# Altium PCB PCB1.PcbDoc
Units mil, origin at the board's own origin, x right, y up, seen from the top; angles counter-clockwise.
Board outline 1658.55 x 1658.55 mil, 2 copper layers (Top Layer, Bottom Layer); 16 components, 15 nets, 51 pads, 4 vias.
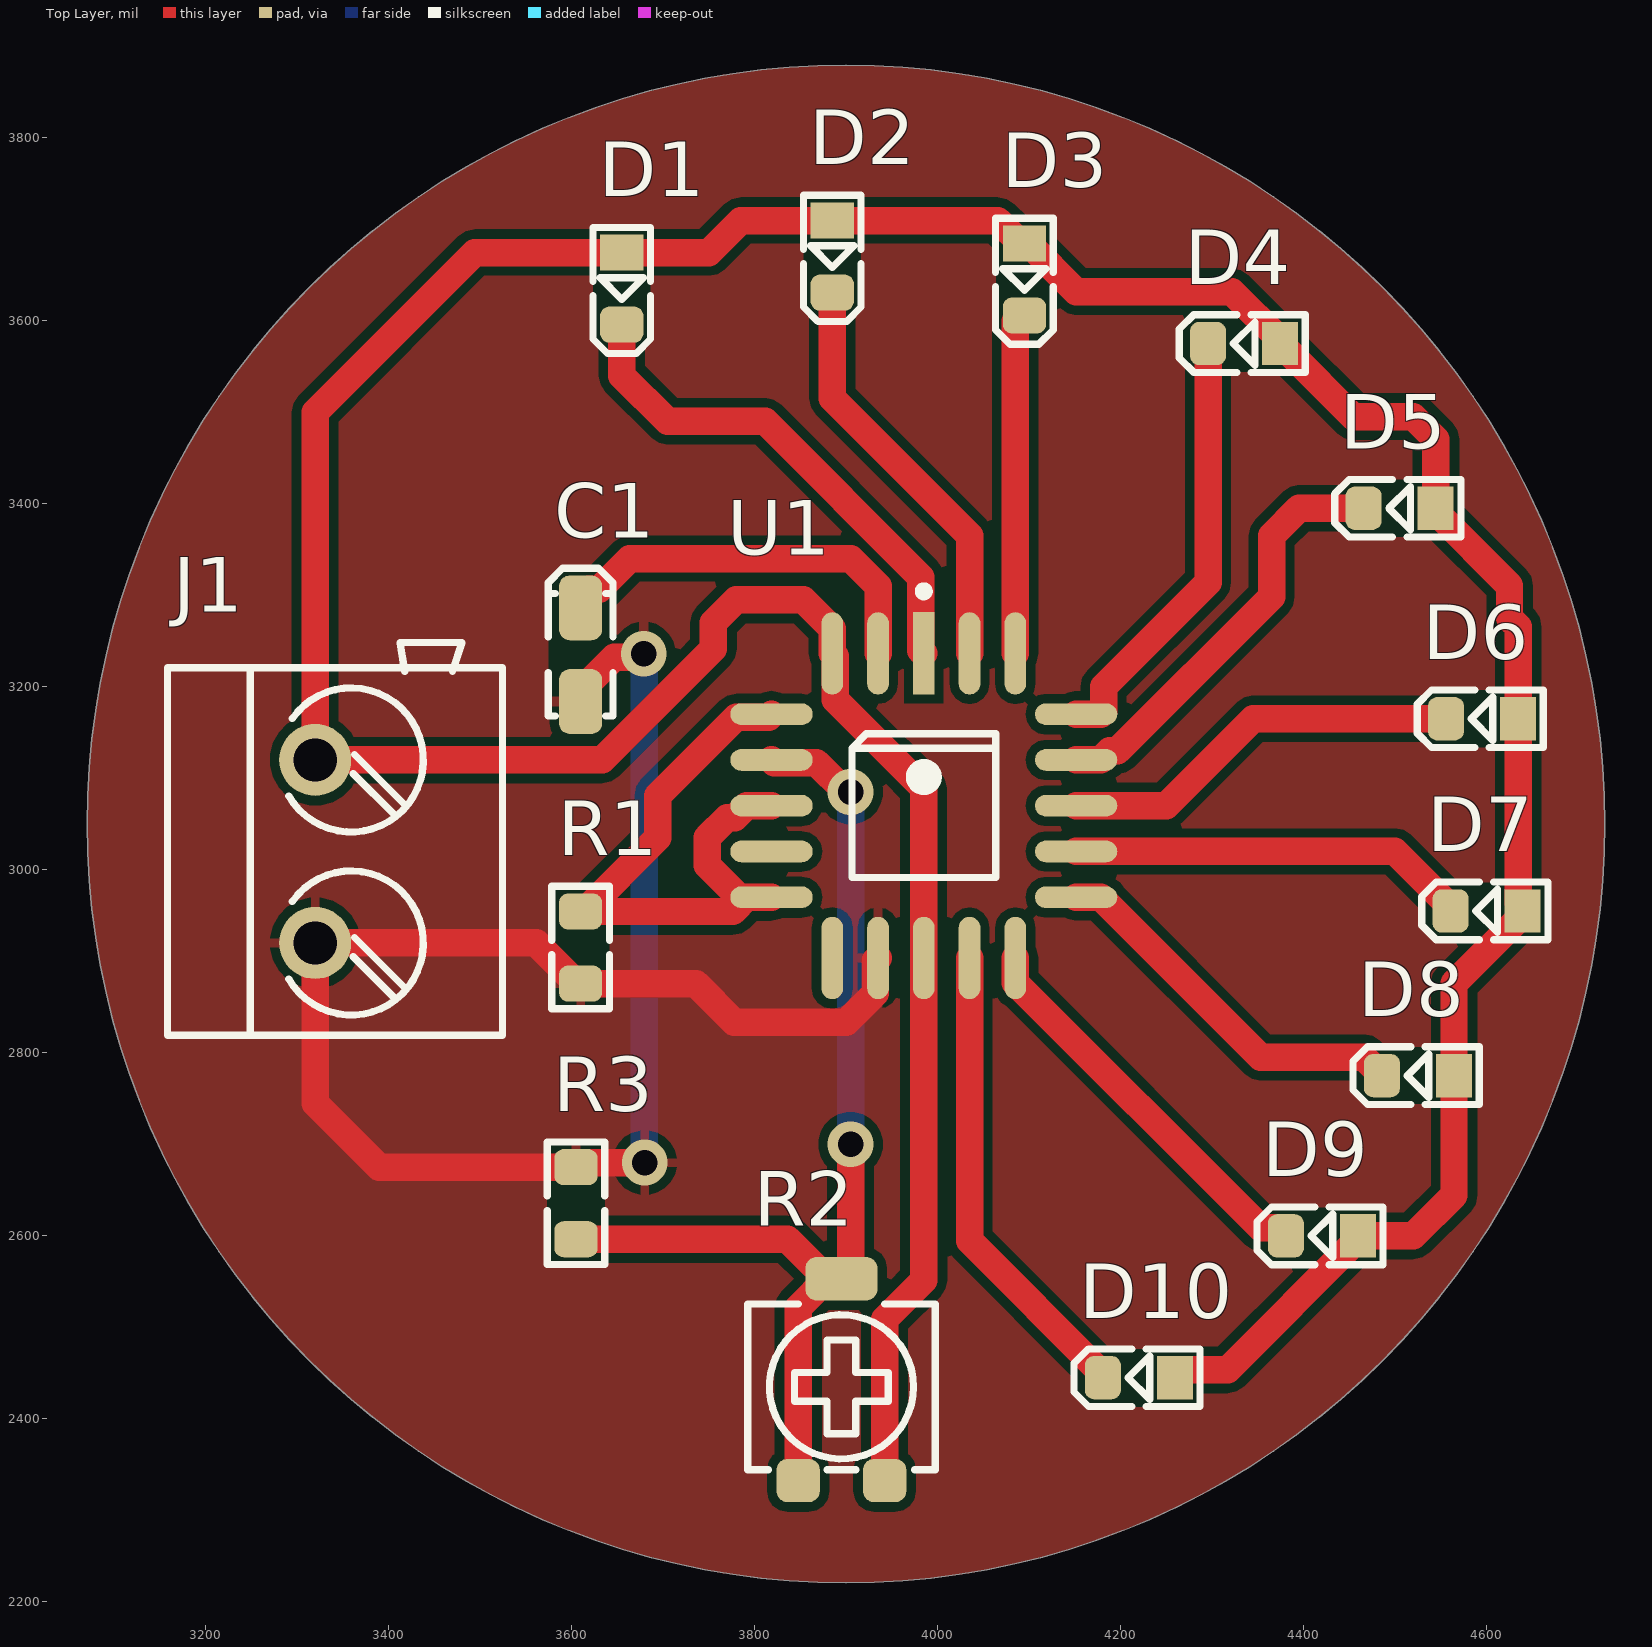
[diagram p0: Top Layer view]
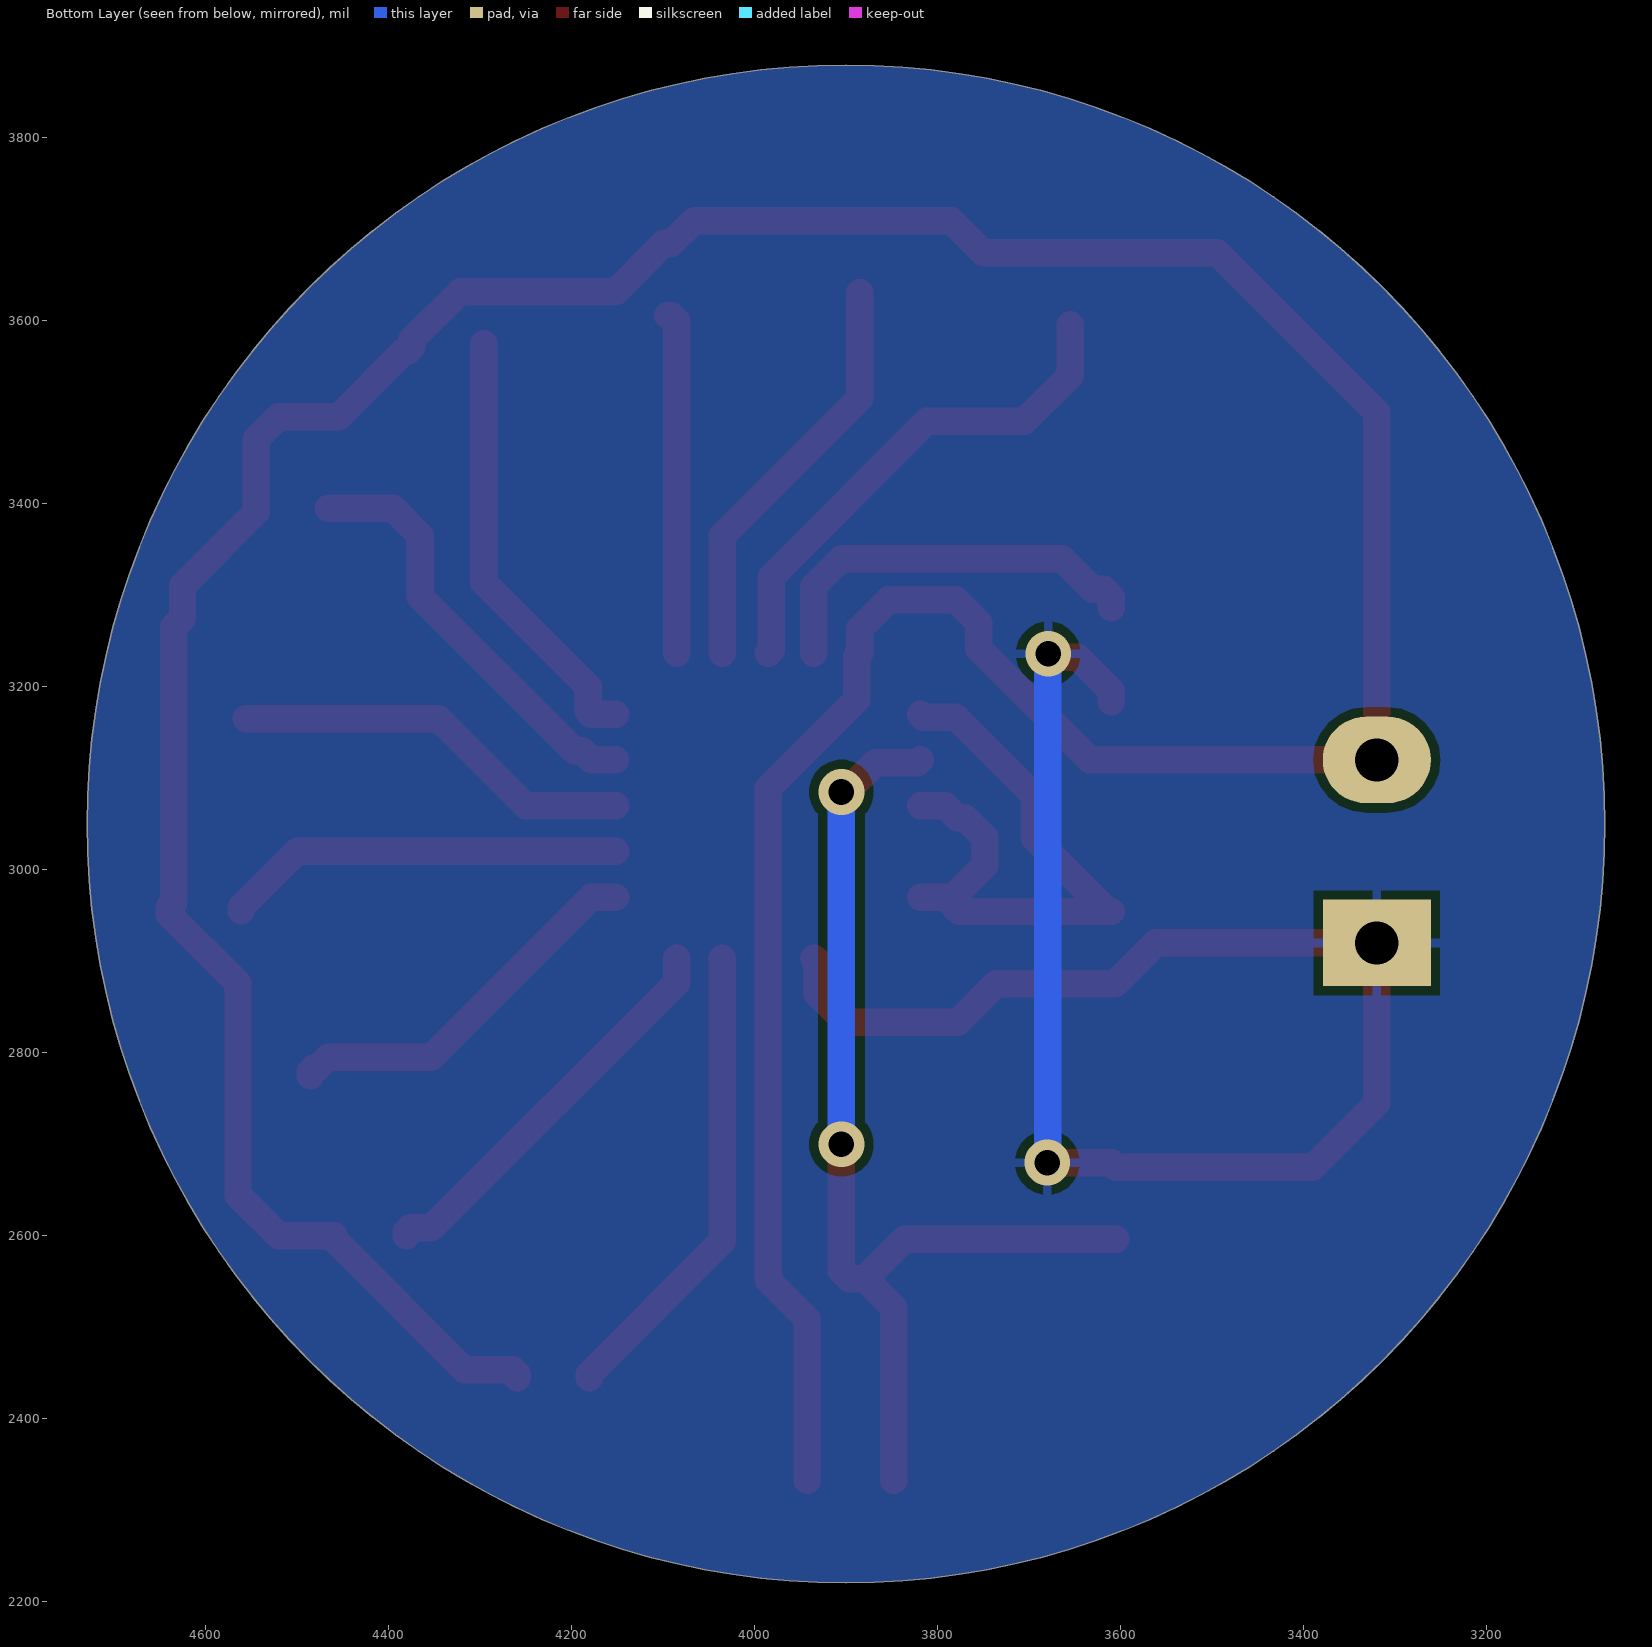
[diagram p1: Bottom Layer view, seen from below]
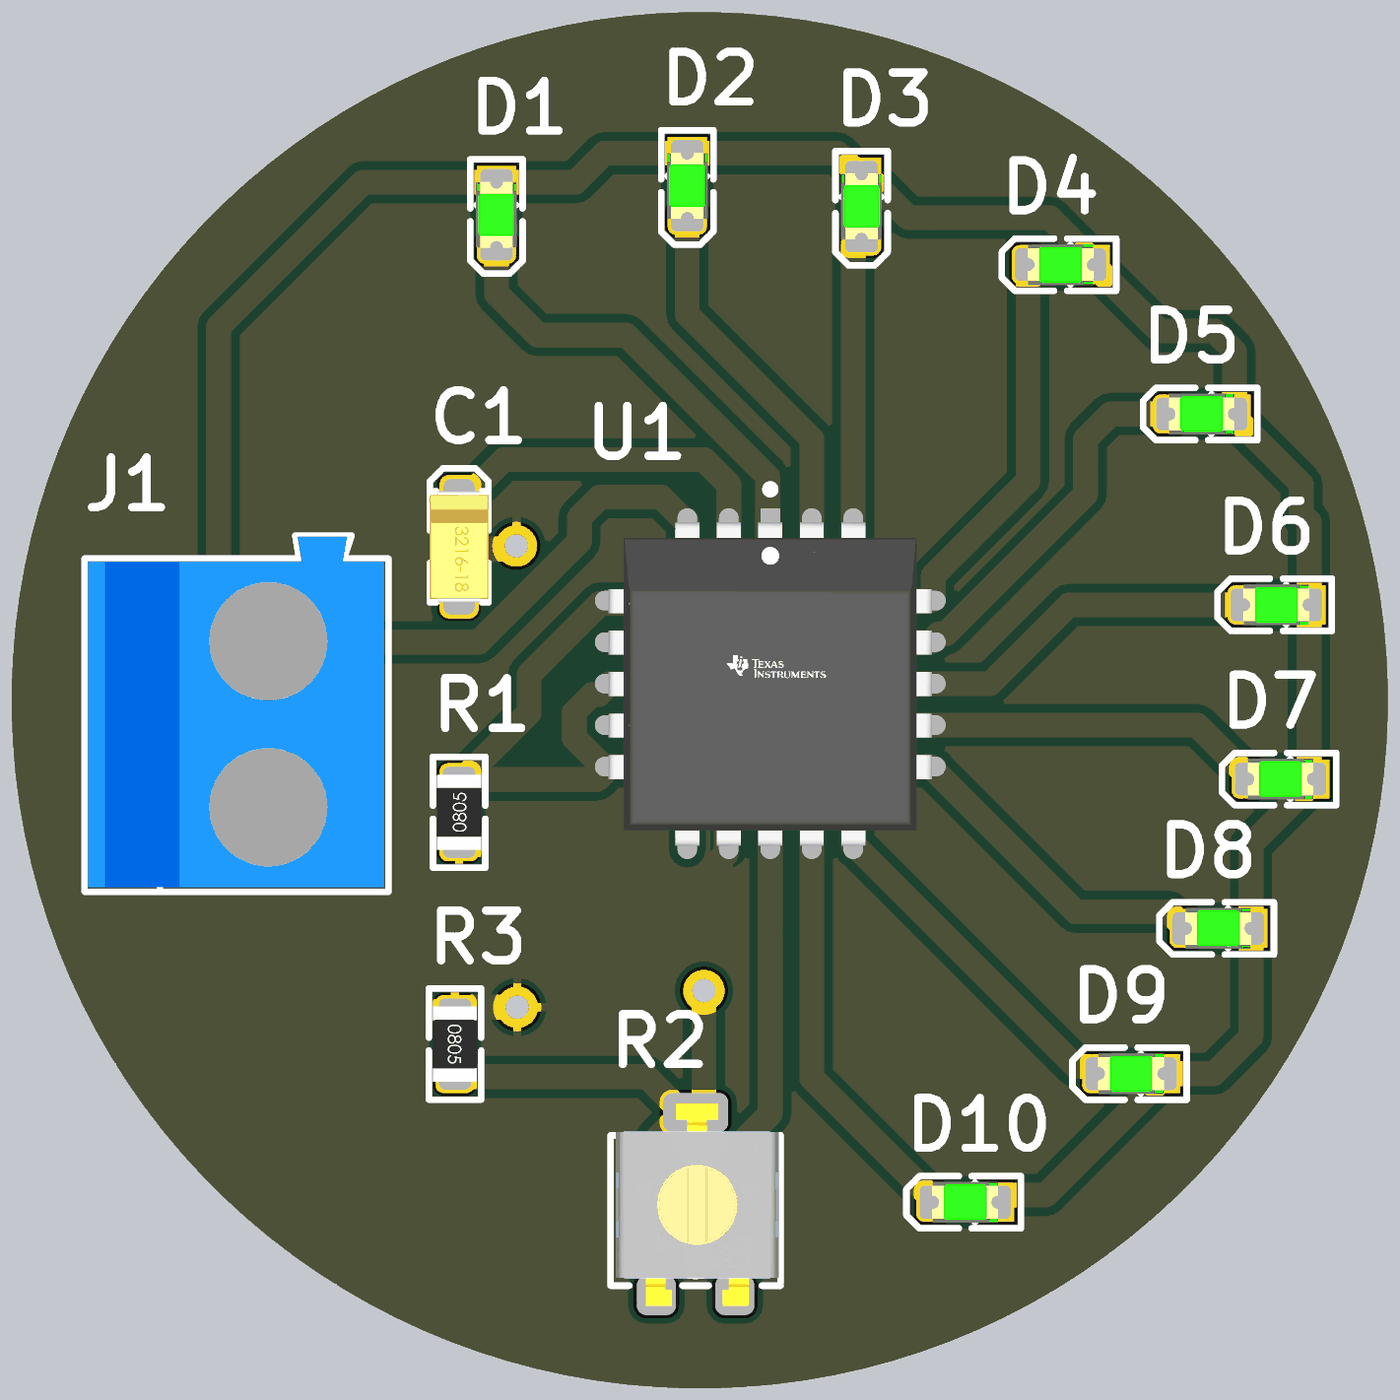
[diagram p2: 3D render of the assembled board from above, using the file's embedded part models]

## Layer stack, top to bottom
Top Solder: solder mask 0.4, Solder Resist, Dk 3.5
Top Layer: signal copper 1.4
Dielectric 1: dielectric 12.6, FR-4, Dk 4.8
Bottom Layer: signal copper 1.4
Bottom Solder: solder mask 0.4, Solder Resist, Dk 3.5

## Board outline
3070.72,3050 ccw(c3900,3050) 3900,2220.72 ccw(c3900,3050) 4729.28,3050 ccw(c3900,3050) 3900,3879.28 ccw(c3900,3050)

## Design rules (kind name [scope] priority, off if disabled: settings)
Clearance [All] p1: gap=10 ignorepadtopadclearanceinfootprint=FALSE
PolygonConnect [All] p1: connectstyle=Relief reliefconductorwidth=10 reliefentries=4 polygonreliefangle="90 Angle" airgapwidth=10
RoutingVias [All] p1: holewidth=28 width=50 viastyle="Through Hole" minholewidth=28 minwidth=50 maxholewidth=28 maxwidth=50
SolderMaskExpansion [All] p1: expansion=4 istentingtop=FALSE
SupplyNets "Schematic Supply Nets_1" [InNet('VCC')] p1: voltage=0.000
SupplyNets "Schematic Supply Nets" [InNet('GND')] p2: voltage=0.000
Width [All] p1: maxlimit=50 minlimit=10 preferedwidth=30 minimp=50.000000 maximp=50.000000 favimp=50.000000
30 further rules are at their usual default settings.

## Components (designator, comment, footprint, x,y, rotation, side; value= is the part's Value field where it differs from the comment)
C1 "-uF" C_TN_3216 3610,3235 r270 top
D1 "LED0805" LED0805 3655,3635 r270 top
D2 "LED0805" LED0805 3885,3670 r270 top
D3 "LED0805" LED0805 4095,3645 r270 top
D4 "LED0805" LED0805 4335,3575 r180 top
D5 "LED0805" LED0805 4505,3395 r180 top
D6 "LED0805" LED0805 4595,3165 r180 top
D7 "LED0805" LED0805 4600,2955 r180 top
D8 "LED0805" LED0805 4525,2775 r180 top
D9 "LED0805" LED0805 4420,2600 r180 top
D10 "LED0805" LED0805 4220,2445 r180 top
J1 "CONN_TB2" TBB_2 3320,3020 r90 top
R1 "1K" R0805 3610,2915 r90 top
R2 "POT 1K" POTS_3314G 3895,2435 r0 top
R3 "1K" R0805 3605,2635.63 r270 top
U1 "LM3914VX/NOPB" FP-FN0020A-IPC_B 3985,3070 r0 top

## Footprints (in the part's own frame and the unit in brackets; to place one, negate y for a bottom-side part, rotate by r counter-clockwise, add the part's x,y. Pads: shape width x height; smd on the part's side, far side on the other; paste and mask are expansions set on the pad)
C_TN_3216 [mm] "CAPACITOR, TAN A, 1206P, 3.2x1.6mm"
  rrect50% 1.8x1.2 smd paste-0.118 mask+0.075: 1(-1.3,0) 2(1.3,0)
  Top Layer pour cut-out: -0.762,0.9 0.762,0.9 0.762,-0.9 -0.762,-0.9
  silkscreen extent -2.4,-0.9 1.7,0.9, body extent -1.7,-0.9 1.7,0.9, height 1.7
FP-FN0020A-IPC_B [mil]
  rect 23.71x90 smd paste+0 mask+0: 1(0,166.41)
  rrect100% 23.71x90 smd paste+0 mask+0: 2(-50,166.41) 3(-100,166.41) 9(-100,-166.41) 10(-50,-166.41) 11(0,-166.41) 12(50,-166.41) 13(100,-166.41) 19(100,166.41) 20(50,166.41)
  rrect100% 90x23.71 smd paste+0 mask+0: 4(-166.41,100) 5(-166.41,50) 6(-166.41,0) 7(-166.41,-50) 8(-166.41,-100) 14(166.41,-100) 15(166.41,-50) 16(166.41,0) 17(166.41,50) 18(166.41,100)
  silkscreen extent -79,-79 79,239, body extent -221,-221 221,221, height 10
LED0805 [mm] "LED SMD 0805"
  rect 1x1.2 smd paste-2 mask+0.075: 1(-1,0)
  rrect50% 1x1.2 smd paste-2 mask+0.075: 2(1,0)
  Top Layer pour cut-out: -0.5,0.8 0.5,0.8 0.5,-0.8 -0.5,-0.8
  silkscreen extent -1.7,-0.8 1.8,0.8, body extent -1.01,-0.62 1.01,0.63, height 1.1
POTS_3314G [mm] "POT SMD, 5.0X5.0mm, Trimming, 3314G"
  rrect50% 1.2x1.2 smd: 1(-1.2,-2.6) 3(1.2,-2.6)
  rrect50% 2x1.2 smd: 2(0,3)
  silkscreen extent -2.6,-2.3 2.6,2.3, body extent -2.45,-2.93 2.55,3.27, height 2.67
R0805 [mm] "CHIP RESISTOR 1/8 WATT ,2.0X1.3mm, 0805, 2012"
  rrect50% 1x1.2 smd paste-0.1 mask+0.075: 1(-1,0) 2(1,0)
  Top Layer pour cut-out: -0.5,0.8 0.5,0.8 0.5,-0.8 -0.5,-0.8
  silkscreen extent -1.7,-0.8 1.7,0.8, body extent -1.15,-0.67 1.15,0.68, height 0.76
TBB_2 [mm] "Terminal Block Blue"
  round 2 / inner round 2 / far side rect 2.4x3 hole 1.2: 1(-2.54,0)
  round 2 / inner round 2 / far side oval 2.4x3 hole 1.2: 2(2.54,0)
  silkscreen extent -5.1,-5.2 5.8,4.1, body extent -4.96,-5.08 5.78,3.99, height 12.52

## Part data
C1: library part CAP_SMD_TAN_3216, "CAP, SMD, TAN,", PARAM2=-V
D1 D2 D3 D4 D5 D6 D7 D8 D9 D10: library part LED_SMD_0805, "LED, SMD, 0805", ASSEMBLY=ASSEMBLY, DESC=DESCRIPTION, MANF=MANF, MANF_P#=MANF_PART#, PARAM2=2.2V, PRICE=PRICE
J1: "CONN, TERMINAL BLOCK, 5.08mm pitch"
R1 R3: library part RES_SMD_0805, "RESISTOR, SMD", ASSEMBLY=ASSEMBLY, DESC=DESCRIPTION, DIST#=MOUSER, MANF=-, MANF_P#=-, PARAM=-W, PARAM2=1%, PRICE="100= 0.5$"
R2: library part RES_SMD_POT_3314G, "RESISTOR, SMD, Potentiometer"
U1: library part CMP-04914-000012-1, "IC DRVR DOT/BAR DISPLAY 20PLCC", Manufacturer="Texas Instruments", Max Supply Voltage=15V, Min Supply Voltage=3V, Output Current=10mA, Output Voltage=1.28V, Package=FN0020A, Temperature="0°C to +70°C", Temperature Range High=+70°C, Temperature Range Low=0°C, Automotive=No, Category=IC, ComponentLink2Description=Datasheet, ComponentLink2URL=http://www.ti.com/lit/ds/symlink/lm3914.pdf, Device Class L1="Integrated Circuits (ICs)", Device Class L2="Power Management ICs", Device Class L3="LED Drivers", Digikey Description="IC DRVR DOT/BAR DISPLAY 20PLCC", Height=4.57mm, Ipc Land Pattern Name=PLCC127P990X990X457-20, Lead Free=Yes, Manufacturer Part Number=LM3914VX/NOPB, Mouser Description="LED Lighting Drivers DOT/BAR DISPLAY DRVR", Number Of Outputs=10, Octopart=https://octopart.com/lm3914vx%2Fnopb-texas+instruments-24814204, RoHS=TRUE, Standoff Height=0.51mm

## Via types
v1: diameter 50, hole 28, Top Layer to Bottom Layer, 4 vias

## Nets (pads, with @x,y where several pads share a name; then routed paths per layer and width w, separated by ;. In a path a pad name is that pad's centre, name@x,y a point inside that pad or via, vN(x,y) a via of type N, cw(c..) or ccw(c..) an arc to the next point about the centre after c; other vN are vias at no path point)
GND: C1.2 J1.1 R1.1 R3.1 U1.10 | length 1920.5
  Top Layer w30: C1.2 3610,3195.63 3646.56,3232.19 3675.15,3232.19 v1(3678.98,3236.02) ; v1(3680,2680) 3623.31,2680 3622.99,2679.69 3609.69,2679.69 R3.1 3390,2675 3320,2745 J1.1 3561.69,2920 3606.06,2875.63 R1.1 3736.08,2875.63 3778.12,2833.59 3900.26,2833.59 3931.85,2865.17 3931.85,2900.44 U1.10
  Bottom Layer w30: v1(3678.98,3236.02) 3679.49,3235.51 3679.49,2680.51 v1(3680,2680)
NetC1_1: C1.1 U1.2 | length 440.2
  Top Layer w30: C1.1 3610,3297.99 3618.62,3306.61 3630.43,3306.61 3663.82,3340 3905,3340 3935,3310 U1.2
NetD1_2: D1.2 U1.1 | length 558.3
  Top Layer w30: D1.2 3655,3540 3705,3490 3811.57,3490 3981.85,3319.72 3981.85,3239.56 U1.1
NetD2_2: D2.2 U1.20 | length 456.3
  Top Layer w30: D2.2 3885,3515 4035,3365 U1.20
NetD3_2: D3.2 U1.19 | length 375.7
  Top Layer w30: U1.19 4085,3599.57 4091.06,3605.63 D3.2
NetD4_2: D4.2 U1.18 | length 480.5
  Top Layer w30: U1.18 4178.27,3170 4181.41,3173.15 4181.41,3200 4295.63,3314.22 D4.2
NetD5_2: D5.2 U1.17 | length 467.2
  Top Layer w30: U1.17 4178.27,3120 4188.27,3130 4196.68,3130 4365,3298.32 4365,3365 4395,3395 D5.2
NetD6_2: D6.2 U1.16 | length 443.6
  Top Layer w30: U1.16 4250,3070 4345,3165 D6.2
NetD7_2: D7.2 U1.15 | length 438.4
  Top Layer w30: U1.15 4499.57,3020 4560.63,2958.94 D7.2
NetD8_2: D8.2 U1.14 | length 417.3
  Top Layer w30: U1.14 4178.27,2970 4353.27,2795 4465.63,2795 4477.01,2783.62 4480.94,2783.62 4485.63,2778.94 D8.2
NetD9_2: D9.2 U1.13 | length 439.4
  Top Layer w30: U1.13 4085,2876.73 4353.11,2608.62 4375.94,2608.62 4380.63,2603.94 D9.2
NetD10_2: D10.2 U1.12 | length 518.9
  Top Layer w30: U1.12 4035,2594.57 4180.63,2448.94 D10.2
NetR1_2: R1.2 U1.4 U1.6 U1.8 | length 695.7
  Top Layer w30: R1.2 R1.2@3613.94,2954.37 ; U1.8@3780.17,2973.15 3748.59,3004.74 3748.59,3035.26 3770.17,3056.85 3778.59,3056.85 3791.73,3070 U1.6 ; U1.8 3791.73,2970 3776.1,2954.37 R1.2@3613.94,2954.37 ; U1.4 3815.44,3166.85 3780.17,3166.85 3694.4,3081.08 3694.4,3034.83 R1.2@3613.94,2954.37
NetR2_1: R2.1 R2.2 R3.2 U1.5 | length 1179.1
  Top Layer w30: R3.2 3836.1,2596.26 R2.2@3879.25,2553.11 ; U1.5 3821.73,3116.85 3867.74,3116.85 3899.59,3085 v1(3905,3085) ; R2.1 3847.76,2521.61 R2.2@3879.25,2553.11 ; v1(3905,2700) 3905,2561.73 3896.38,2553.11 R2.2 R2.2@3879.25,2553.11
  Bottom Layer w30: v1(3905,2700) v1(3905,3085)
VCC: D1.1 D2.1 D3.1 D4.1 D5.1 D6.1 D7.1 D8.1 D9.1 D10.1 J1.2 R2.3 U1.3 U1.11 | length 4740.7
  Top Layer w30: R2.3 3942.24,2508.92 3985,2551.68 U1.11 3985,3088.85 3888.15,3185.7 3888.15,3233.27 U1.3 3885,3263.27 3853.27,3295 3780,3295 3755,3270 3755,3241.33 3633.67,3120 J1.2 3320,3500 3494.37,3674.37 D1.1 3750.16,3674.37 3785.16,3709.37 D2.1 4066.06,3709.37 4091.06,3684.37 D3.1 4098.94,3684.37 4151.65,3631.65 4321.65,3631.65 4374.37,3578.94 D4.1 4374.37,3571.06 4379.06,3566.38 4382.99,3566.38 4454.37,3495 4520,3495 4544.37,3470.63 D5.1 4544.37,3391.06 4625,3310.43 4625,3275 4634.37,3265.63 D6.1 4634.37,2963.94 4639.37,2958.94 D7.1 4639.37,2951.06 4564.37,2876.06 D8.1 4564.37,2644.37 4520,2600 D9.1 4459.37,2596.06 4316.93,2453.62 4264.06,2453.62 4259.37,2448.94 D10.1
pads on no net: U1.7 U1.9

## Polygon pours and split planes (outlines as drawn)
GND on Top Layer "GND_L01_P000" (solid, pour order 0): 3070.72,3050 ccw(c3900,3050) 3900,2220.72 ccw(c3900,3050) 4729.28,3050 ccw(c3900,3050) 3900,3879.28 ccw(c3900,3050)
GND on Bottom Layer "GND_L02_P001" (solid, pour order 1): 3070.72,3050 ccw(c3900,3050) 3900,2220.72 ccw(c3900,3050) 4729.28,3050 ccw(c3900,3050) 3900,3879.28 ccw(c3900,3050)

## Silkscreen, mask and mechanical layers (free items; w line width, h text height)
Mechanical 1:
  circle w40: c3900,3050 r829.28